# EAGLE board Christmas-Snow-Globe v16 (EAGLE 9.7.0)
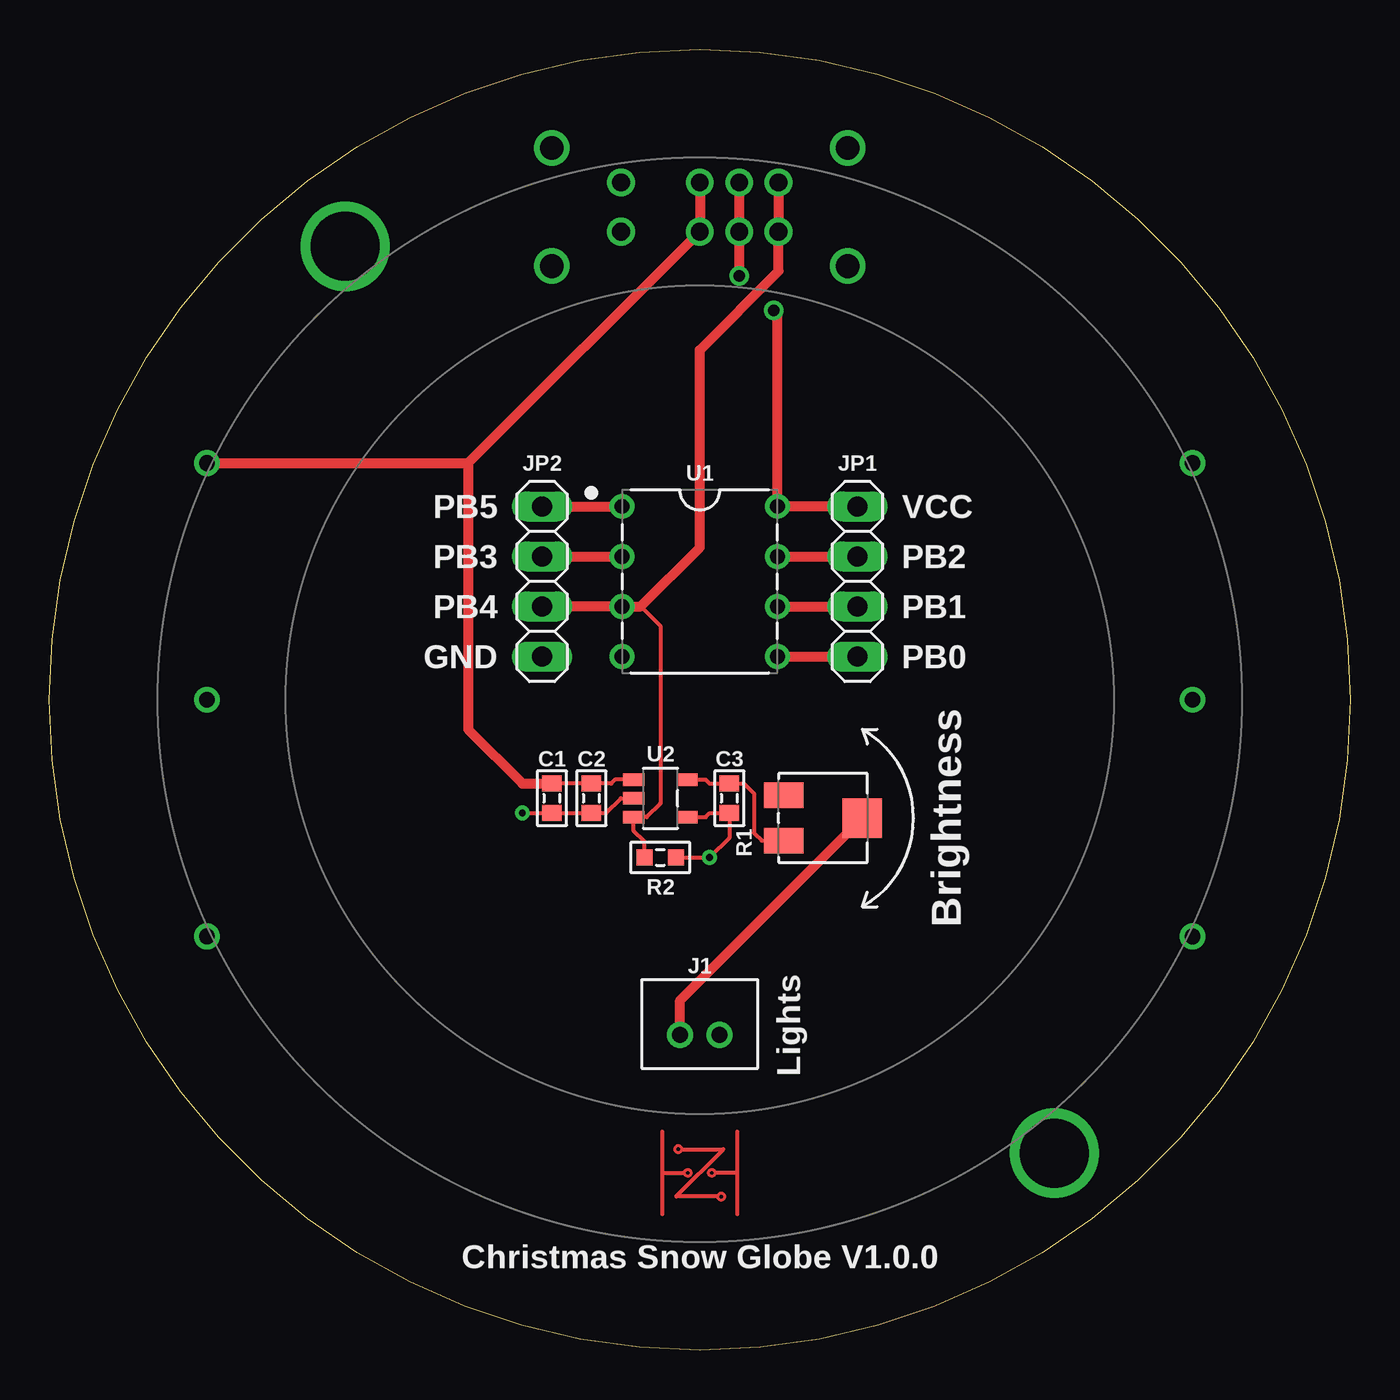
[diagram p0: board, top side]
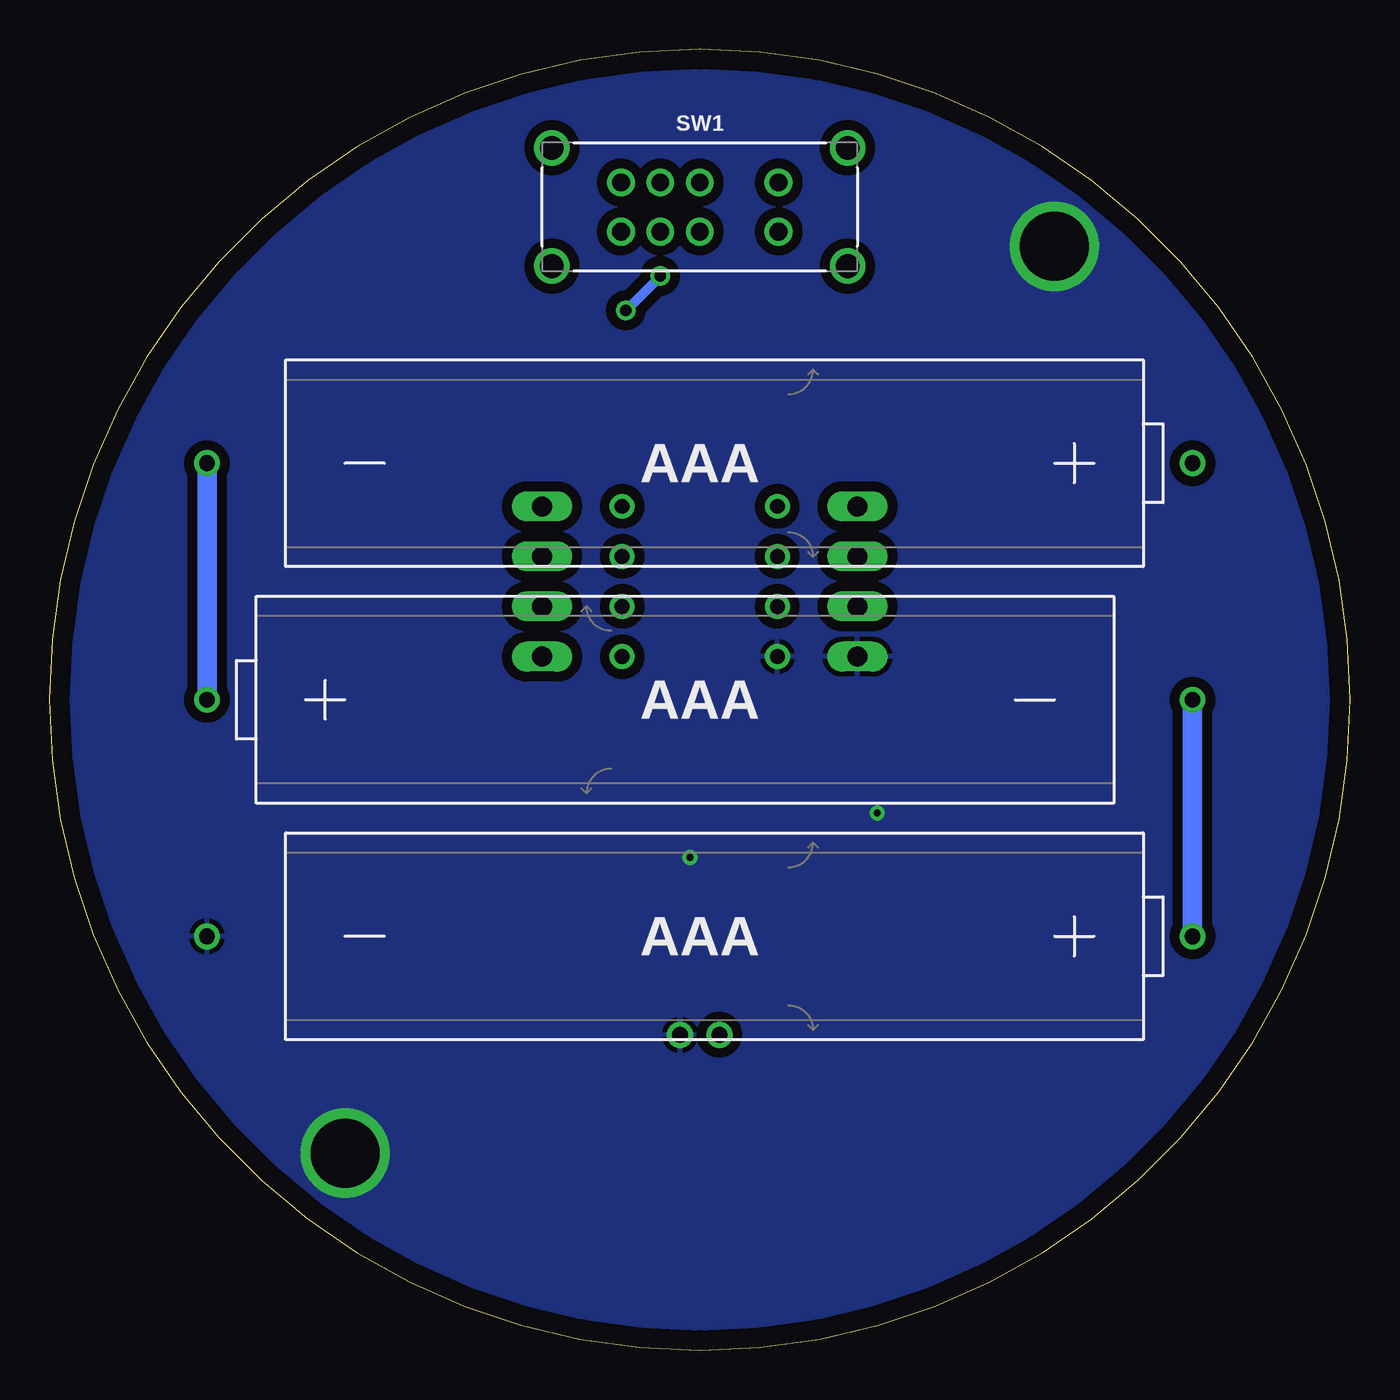
[diagram p1: board, bottom side, seen from below]

Size 66 x 66 mm. Coordinates in mm from the lower left corner, seen from the top.
Outline: 33,0 arc-90 0,33 arc-90 33,66 arc-90 66,33 arc-90 33,0
Copper layers (1*16): Top 0.035mm / dielectric 1.5mm / Bottom 0.035mm
Design rules "default": minimum track width 6mil, minimum drill 0.35mm, track to track 6mil, track to pad 6mil, pad to pad 6mil, via to via 6mil, smd to smd 6mil, copper to edge 40mil, drill to drill 6mil, minimum pad ring 10mil, minimum via ring 8mil, stop-mask expansion 4mil, vias tented up to drill 0mil, thermal gap 10mil

## Footprints (pad centres in the part's own frame; a part is rotated, then mirrored left to right if it is on the bottom)
AAA-CONTACTS = drill 0.8 slot 3.5 rotated 90: + 25,0; - -25,0
1608-SEM = smd 0.8 x 1: 1 -0.75,0; 2 0.75,0
B2B-PH-K-S = drill 0.8: 1 -1,0; 2 1,0
1X04 = drill 1.016 long: 1 -3.81,0; 2 -1.27,0; 3 1.27,0; 4 3.81,0
3314J = smd 1.3 x 2: 1 -1.15,2; 3 1.15,2 | smd 2 x 2: 2 0,-2
1608-SEM' = smd 0.8 x 0.8: 1 -0.8,0; 2 0.8,0
EG2301 = drill 0.9: 1 -4,-1.25; 2 -2,-1.25; 3 0,-1.25; 4 4,-1.25; 5 -4,1.25; 6 -2,1.25; 7 0,1.25; 8 4,1.25 | drill 1.2: SHIELD@1 -7.5,3; SHIELD@2 -7.5,-3; SHIELD@3 7.5,-3; SHIELD@4 7.5,3
8P3-PDIP = drill 0.75: 1 -3.937,3.81; 2 -3.937,1.27; 3 -3.937,-1.27; 4 -3.937,-3.81; 5 3.937,3.81; 6 3.937,1.27; 7 3.937,-1.27; 8 3.937,-3.81
SOT-23-5 = smd 1.1 x 0.6: 1 -1.35,0.95; 2 -1.35,0; 3 -1.35,-0.95; 4 1.35,-0.95; 5 1.35,0.95

## Placement (x,y rotation side)
BT1  AAA  [AAA-CONTACTS]  33,21 0 bottom
BT2  AAA  [AAA-CONTACTS]  33,33 180 bottom
BT3  AAA  [AAA-CONTACTS]  33,45 0 bottom
C1  0.1µF ± 5%  [1608-SEM]  25.5,28 270 top
C2  1.0µF ± 10%  [1608-SEM]  27.5,28 270 top
C3  1.0µF ± 10%  [1608-SEM]  34.5,28 270 top
J1  JST-PH-2  [B2B-PH-K-S]  33,16 0 top
JP1  [1X04]  41,39 270 top
JP2  [1X04]  25,39 270 top
R1  10kΩ  [3314J]  39.25,27 90 top
R2  6.2MΩ ± 1%  [1608-SEM']  31,25 0 top
SW1  SWITCH-DP3T  [EG2301]  33,58 0 bottom
U1  ATtiny85  [8P3-PDIP]  33,39 0 top
U2  TPS782  [SOT-23-5]  31,28 0 top
U$14  SIGNATURE  [SIGNATURE]  33,9 0 top

## Library data of the parts
BT1-BT3 = Harrington-Energy; CAPACITY: 800-1200mAh; VOLTAGE: 1.1-1.6V
C1-C3 = Harrington-Capacitors; SIZE: 1608; TEMPERATURE: X7R; VOLTAGE: 50V
J1 = Harrington-Connectors
JP1 JP2 = pinhead
R1 = Harrington-Resistors
R2 = Harrington-Resistors; POWER: 1/10W; TEMPERATURE: -55~155°C; VOLTAGE: 50V
SW1 = Harrington-Switches
U1 = Harrington-ICs
U2 = Harrington-ICs; VOLTAGE: 2.7V
U$14 = Harrington-Aesthetics

## Nets
3.3V: BT3.+ C1.1 C2.1 SW1.3 SW1.7 U2.1
EN: JP2.3 R2.1 SW1.1 SW1.5 U1.3 U2.3
GND: BT1.- C1.2 C2.2 C3.2 J1.2 JP2.4 R2.2 U1.4 U2.2 U2.4
LEDS+: J1.1 R1.2
N$1: BT2.+ BT3.-
N$2: BT1.+ BT2.-
PB0: JP1.4 U1.8
PB1: JP1.3 U1.7
PB2: JP1.2 U1.6
PB3: JP2.2 U1.2
PB5: JP2.1 U1.1
TIMER: JP1.1 SW1.2 SW1.6 U1.5
TPS782_OUT: C3.1 R1.1 U2.5

## Tracks (layer width: path | path; a pad name or v marks a point on that pad's centre or on a via)
3.3V
  Top 0.2: U2.1 28.7,28.95 28.5,28.75 C2.1 C1.1
  Top 0.5: SW1.7 SW1.3 21.25,45 | BT3.+ 21.25,45 | 21.25,45 21.25,31.5 24,28.75 C1.1
EN
  Top 0.2: 30,37.73 30.02,37.73 31,36.75 31,27.75 30.3,27.05 U2.3 29.65,26.35 30.2,25.8 R2.1
  Top 0.5: JP2.3 U1.3 30,37.73 33,40.73 33,50.75 37,54.75 SW1.1 SW1.5
GND  (via drill 0.35, 3.5)
  Top 0.2: R2.2 v33.5,25 34.5,26 C3.2 33.5,27.25 33.3,27.05 U2.4 | v24,27.25 C1.2 C2.2 28.25,27.25 29,28 U2.2
  other vias: 15,56 51,10
  pour Bottom (isolate 0.5): -0.95,-0.95 66.95,-0.95 66.95,66.95 -0.95,66.95
LEDS+
  Top 0.5: J1.1 32,17.75 R1.2
N$1
  Bottom 1: BT2.+ BT3.-
N$2
  Bottom 1: BT1.+ BT2.-
PB0
  Top 0.5: U1.8 JP1.4
PB1
  Top 0.5: U1.7 JP1.3
PB2
  Top 0.5: U1.6 JP1.2
PB3
  Top 0.5: JP2.2 U1.2
PB5
  Top 0.5: JP2.1 U1.1
TIMER  (via drill 0.6)
  Top 0.5: JP1.1 U1.5 36.94,52.56 v36.75,52.75 | SW1.6 SW1.2 v35,54.5
  Bottom 0.5: v36.75,52.75 v35,54.5
TPS782_OUT
  Top 0.2: U2.5 33.3,28.95 33.5,28.75 C3.1 35.25,28.75 35.75,28.25 35.75,26.25 36.15,25.85 R1.1

## Text on the board
tPlace: PB5 | VCC | PB3 | PB2 | PB4 | PB1 | GND | PB0 | Brightness | Lights | Christmas Snow Globe V1.0.0